# Altium PCB PCB1.PcbDoc (part 2 of 2)
Units mm, origin at the board's own origin, x right, y up, seen from the top; angles counter-clockwise.
Board outline 143 x 70 mm, 2 copper layers (Top Layer, Bottom Layer); 99 components, 75 nets, 372 pads, 741 vias.
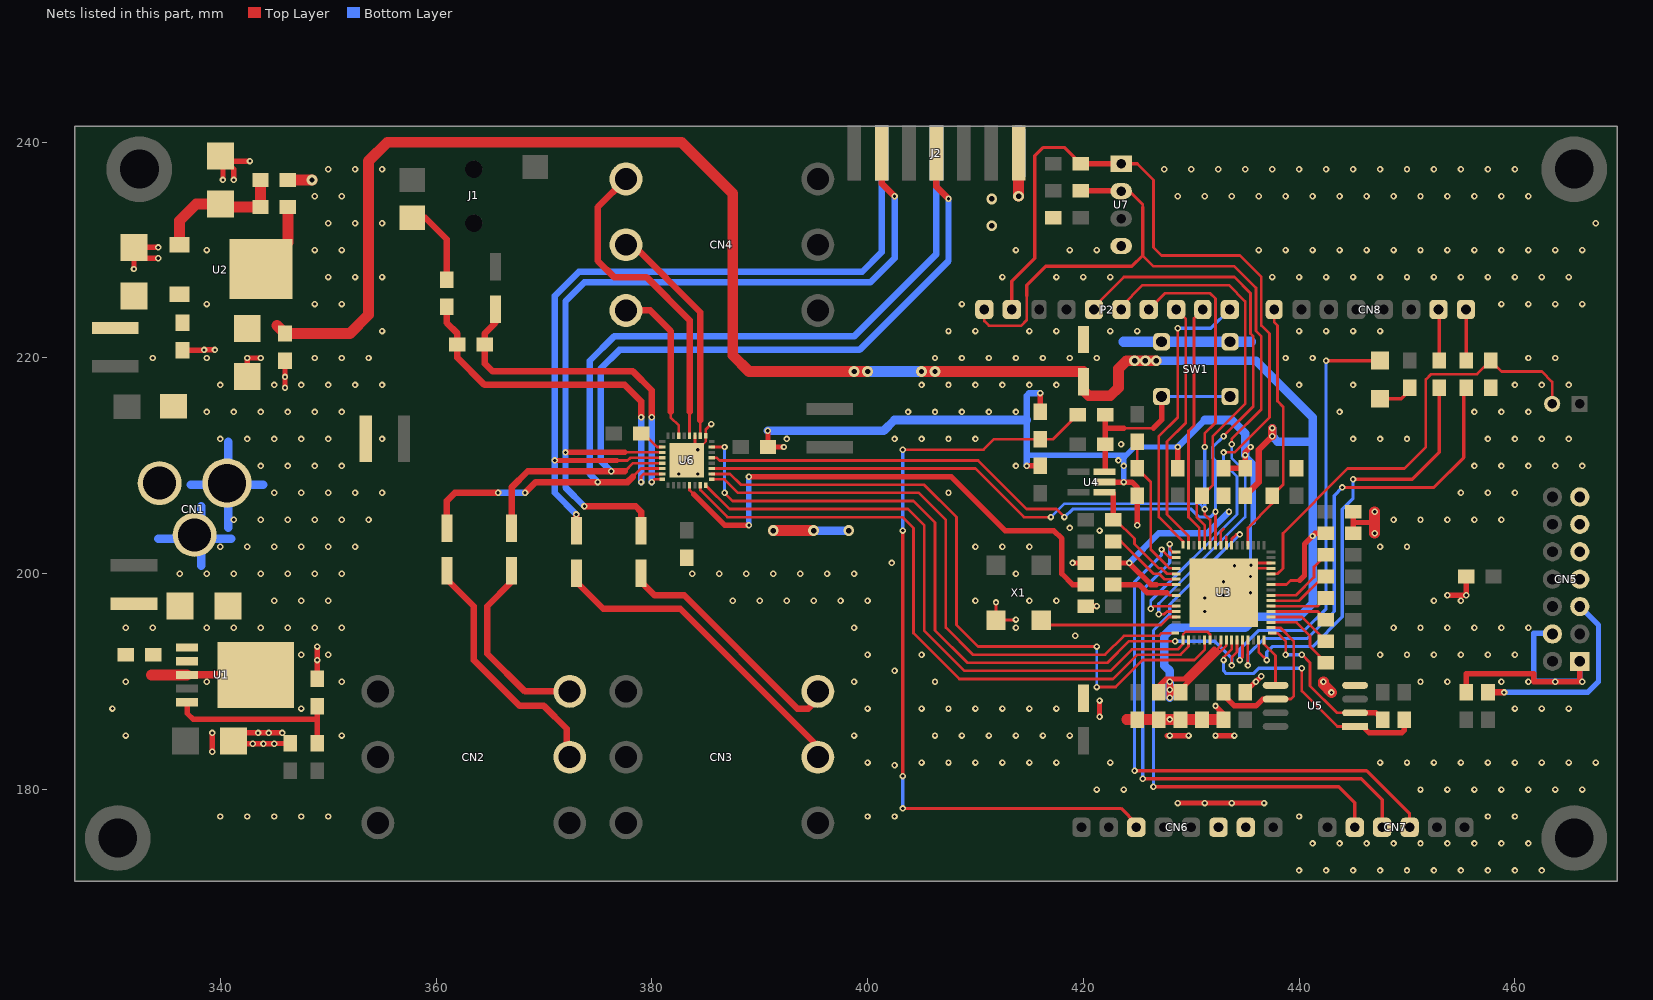
[diagram p2: the nets of this part, all layers, seen from the top]

## Via types
v1: diameter 0.6, hole 0.3, Top Layer to Bottom Layer, tented both sides, 545 vias
v2: diameter 0.6, hole 0.3, Top Layer to Bottom Layer, 165 vias
v3: diameter 1, hole 0.5, Top Layer to Bottom Layer, 31 vias

## Nets (pads, with @x,y where several pads share a name; then routed paths per layer and width w, separated by ;. In a path a pad name is that pad's centre, name@x,y a point inside that pad or via, vN(x,y) a via of type N, cw(c..) or ccw(c..) an arc to the next point about the centre after c; other vN are vias at no path point) (continued)
DGND: C1.2 C2.2 C3.2 C4.2 C5.2 C6.2 C7.2 C8.2 C9.2 C16.1 C17.1 C18.2 C19.1 C20.2 C21.2 C22.1 C23.1 C24.1 C25.2 C26.1 C27.2 C28.2 C29.1 C30.1 C31.1 C32.2 C34.2 C35.2 C36.2 CN1.1 CN1.3 CN5.1 CN5.4 CN5.7 CN5.9 CN5.11 CN5.13 CN6.6 CN6.7 J2.1 J2.2 L4.2 R3.1 R4.1 R6.1 R12.1 R23.1 R26.1 R29.2 SW1.1 SW1.2 U1.3 U1.6 U3.29 U3.30 U3.65 U4.2 U5.4 U6.1 U6.3 U6.EXP U7.4 X1.2 | length 299.7
  Top Layer w0.2: U6.EXP@384,211.25 v2(384.25,211.5) 385,212.25 U6.1@385,212.8
  Top Layer w0.25: v2(383.25,210.5) 384,211.25 U6.3@384,212.8 ; U6.1@385,212.8 385,213.377 v2(385.5,213.877) ; U3.65@435.35,200.6 435.45,200.5 U3.29@437.394,200.5 ; U3.65@435.75,201 U3.30@437.394,201
  Top Layer w0.3: v2(411.905,197.346) X1.2@411.905,195.71 413.71,195.71 v2(413.75,195.75)
  Top Layer w0.5: v2(332,228.25) 332,229.25 v2(334.25,229.25) 332.985,229.25 C3.2@332,230.235 C3.2@332,230.5 ; C3.2@332,230.75 332.5,230.25 v2(334.25,230.25) ; C2.2@336.5,220.73 338.48,220.73 v2(338.5,220.75) v2(339.5,220.75) ; v2(339.25,183.5) v2(339.25,185.25) ; v2(341.25,236.5) 341.25,237.5 C9.2@340,238.75 ; C6.2@342.5,218.265 v2(342.5,220) v2(343.75,220) ; v2(342.75,238.25) 340.5,238.25 C9.2@340,238.75 ; v2(345.75,185.25) v2(344.5,185.25) v2(343.5,185.25) 341.985,185.25 C1.2@341.235,184.5 341.485,184.25 v2(343,184.25) v2(344,184.25) v2(345,184.25) 345.02,184.27 C4.2@346.5,184.27 ; v2(346,217.25) v2(346,218.25) C5.2@346,219.73 ; R3.1@349,190.27 v2(349,192) v2(349,193.25) ; v2(382.5,209.25) 382.5,209.75 v2(383.25,210.5) 383.25,210.25 v2(384.25,209.25) ; v2(390.75,213.25) 390.77,213.23 C34.2@390.77,211.75 v2(392.25,211.75) ; v2(414.75,210) 414.77,210.02 C17.1@416,210.02 ; R29.2@416,215.02 v2(416,216.75) ; v2(419,201) C28.2@420.23,201 ; C23.1@420.23,197 v2(421.25,197) ; v2(421.5,186.75) v2(421.5,188.25) ; U4.2@421.956,208.5 v2(423.75,208.5) 424.5,208.5 425,208 ; v2(425,204.5) R12.1@425,207.23 ; v2@427.75,185 v2(428,185) v2(429.75,185) ; v2(428.75,178.75) v2(431.25,178.75) v2(433.75,178.75) v2(436.75,178.75) ; v2(428.75,211.75) 428.75,210.02 C19.1@429,209.77 ; v2(431.25,197.75) v2(431.25,196.5) U3.65@433,198.25 ; v2(432.25,185) v2(434,185) ; v2(432.25,187.75) 433,187 R26.1@433,186.48 R26.1@432.98,186.5 ; C27.2@433,209.77 C30.1@435,209.77 v2(435,211) 435,211.25 v2(435.5,211.75) ; v2(434,200.75) 433.5,200.25 U3.65@434.25,199.5 ; C32.2@435,189.02 435.98,190 v2(436,190) v2(436.5,190.5) ; U3.65@435.75,201 v2(435.55,200.8) 435.35,200.6 U3.65@434.25,199.5 ; C20.2@439.75,209.77 440,210.02 C20.2@439.75,210.27 ; C31.1@445.02,203.75 445.02,204.75 ; C22.1@445.02,205.75 445.02,204.75 ; 447,204.75 445.02,204.75 ; v2(453.75,198) v2(455.5,198) 455.48,198.02 R23.1@455.48,199.75 ; C16.1@455.5,189.02 455.5,190.75 461.75,190.75 461.75,190 466,190 466,191.86 CN5.1@466.02,191.88 ; C9.2@340,238.75 340.25,238.5 v2(340.25,236.5) 340.25,238.25 339.765,238.735 C9.2@340,238.735 C9.2@340,238.75 ; U3.65@433,198.25 v2(433,199.25) 435,199.25 v2(435.5,199.75) v2(435.5,198.25) 434.75,199 U3.65@434.25,199.5 ; U3.65@433,198.25 U3.65@434.25,199.5
  Top Layer w0.7: U1.3@336.928,190.627 U1.6@343.278,190.627
  Top Layer w1: 333.623,190.627 U1.3@336.928,190.627 ; R4.1@346.27,236.5 v3(348.5,236.5) ; v3(391.25,204) v3(395,204) ; v3(414,235) J2.2@414,239 ; 424.02,186.48 C24.1@425,186.48 C26.1@427,186.48 R26.1@433,186.48 ; v2(442.25,190) 442.25,189.75 v2(443,189) ; v2(447,203.75) 447,204.75 v2(447,205.75)
  Bottom Layer w0.3: v2(433,198) 435.5,200.5 435.5,204.5 435.75,204.75
  Bottom Layer w0.5: 414.75,211 424,211 ; v2(423.75,208.5) 423.75,210.75 424,211 ; v2(428.75,211.75) 424.75,211.75 424,211 ; v2(435,211) 435.75,210.25 435.75,204.75 ; CN5.4@463.48,194.42 463.4,194.5 461.75,194.5 461.75,190.04 461.77,190.02 466.02,190.02 CN5.1@466.02,191.88
  Bottom Layer w0.6: v2(414.75,210) 414.75,211 414.75,214.25 414.75,216.5 415,216.75 v2(416,216.75) ; v2(428.75,211.75) 431.25,214.25
  Bottom Layer w0.8: 334.25,203.25 CN1.3@338.25,203.25 ; 337.25,208.25 CN1.1@340.75,208.25 ; 338.25,200.75 CN1.3@338.25,203.25 ; 338.25,206.25 CN1.3@338.25,203.25 ; 340.75,204.25 CN1.1@340.75,208.25 ; 340.75,212.25 CN1.1@340.75,208.25 ; 341,203.25 CN1.3@338.25,203.25 ; 344,208.25 CN1.1@340.75,208.25 ; v2(390.75,213.25) 401.5,213.25 402.5,214.25 414.75,214.25 ; v3(395,204) v3(398.25,204) ; v3(414,235) J2.1@414,239 ; 431.25,214.25 433.75,214.25 435,213 v2(435,211)
  Bottom Layer w1: 423.75,221.5 SW1.1@427.25,221.5 SW1.2@433.6,221.5 435.5,221.5
  other v1: 440,172.5 442.5,172.5 445,172.5 447.5,172.5 450,172.5 452.5,172.5 455,172.5 457.5,172.5 460,172.5 462.5,172.5 441.25,175 443.75,175 446.25,175 448.75,175 451.25,175 453.75,175 456.25,175 458.75,175 461.25,175 340,177.5 342.5,177.5 345,177.5 347.5,177.5 350,177.5 400,177.5 402.5,177.5 440,177.5 457.5,177.5 460,177.5 421.25,180 423.75,180 451.25,180 453.75,180 456.25,180 458.75,180 461.25,180 463.75,180 466.25,180 400,182.5 405,182.5 407.5,182.5 410,182.5 412.5,182.5 415,182.5 417.5,182.5 422.5,182.5 447.5,182.5 450,182.5 452.5,182.5 455,182.5 457.5,182.5 460,182.5 462.5,182.5 465,182.5 467.5,182.5 331.25,185 351.25,185 398.75,185 406.25,185 408.75,185 411.25,185 413.75,185 416.25,185 418.75,185 330,187.5 347.5,187.5 400,187.5 405,187.5 407.5,187.5 410,187.5 412.5,187.5 415,187.5 417.5,187.5 460,187.5 462.5,187.5 465,187.5 331.25,190 338.75,190 351.25,190 398.75,190 406.25,190 451.25,190 453.75,190 458.75,190 461.25,190 463.75,190 466.25,190 347.5,192.5 350,192.5 400,192.5 405,192.5 447.5,192.5 450,192.5 452.5,192.5 455,192.5 457.5,192.5 460,192.5 331.25,195 333.75,195 338.75,195 341.25,195 343.75,195 346.25,195 348.75,195 351.25,195 398.75,195 413.75,195 448.75,195 451.25,195 453.75,195 456.25,195 458.75,195 461.25,195 345,197.5 347.5,197.5 350,197.5 387.5,197.5 390,197.5 392.5,197.5 395,197.5 397.5,197.5 400,197.5 410,197.5 415,197.5 417.5,197.5 452.5,197.5 455,197.5 336.25,200 338.75,200 341.25,200 343.75,200 346.25,200 348.75,200 351.25,200 383.75,200 386.25,200 388.75,200 391.25,200 393.75,200 396.25,200 398.75,200 413.75,200 340,202.5 342.5,202.5 345,202.5 347.5,202.5 350,202.5 352.5,202.5 410,202.5 412.5,202.5 415,202.5 447.5,202.5 450,202.5 341.25,205 343.75,205 346.25,205 348.75,205 351.25,205 353.75,205 448.75,205 451.25,205 453.75,205 456.25,205 458.75,205 345,207.5 347.5,207.5 350,207.5 352.5,207.5 355,207.5 407.5,207.5 455,207.5 457.5,207.5 460,207.5 343.75,210 346.25,210 348.75,210 351.25,210 413.75,210 423.75,210 456.25,210 458.75,210 461.25,210 463.75,210 466.25,210 340,212.5 342.5,212.5 345,212.5 347.5,212.5 350,212.5 355,212.5 392.5,212.5 402.5,212.5 405,212.5 407.5,212.5 410,212.5 445,212.5 447.5,212.5 450,212.5 457.5,212.5 460,212.5 462.5,212.5 465,212.5 338.75,215 341.25,215 343.75,215 346.25,215 348.75,215 351.25,215 403.75,215 406.25,215 408.75,215 411.25,215 413.75,215 443.75,215 456.25,215 458.75,215 461.25,215 340,217.5 345,217.5 347.5,217.5 350,217.5 352.5,217.5 355,217.5 405,217.5 407.5,217.5 410,217.5 412.5,217.5 415,217.5 417.5,217.5 440,217.5 445,217.5 460,217.5 462.5,217.5 465,217.5 333.75,220 338.75,220 348.75,220 351.25,220 353.75,220 406.25,220 408.75,220 411.25,220 413.75,220 416.25,220 418.75,220 421.25,220 438.75,220 441.25,220 461.25,220 463.75,220 355,222.5 407.5,222.5 410,222.5 415,222.5 417.5,222.5 422.5,222.5 425,222.5 440,222.5 442.5,222.5 445,222.5 447.5,222.5 338.75,225 348.75,225 351.25,225 408.75,225 458.75,225 461.25,225 463.75,225 466.25,225 350,227.5 352.5,227.5 355,227.5 412.5,227.5 417.5,227.5 420,227.5 422.5,227.5 437.5,227.5 440,227.5 442.5,227.5 445,227.5 447.5,227.5 450,227.5 452.5,227.5 455,227.5 457.5,227.5 460,227.5 462.5,227.5 465,227.5 338.75,230 348.75,230 351.25,230 413.75,230 418.75,230 421.25,230 436.25,230 438.75,230 441.25,230 443.75,230 446.25,230 448.75,230 451.25,230 453.75,230 456.25,230 458.75,230 461.25,230 463.75,230 466.25,230 350,232.5 352.5,232.5 355,232.5 467.5,232.5 348.75,235 351.25,235 428.75,235 431.25,235 433.75,235 436.25,235 438.75,235 441.25,235 443.75,235 446.25,235 448.75,235 451.25,235 453.75,235 456.25,235 458.75,235 461.25,235 350,237.5 352.5,237.5 355,237.5 427.5,237.5 430,237.5 432.5,237.5 435,237.5 437.5,237.5 440,237.5 442.5,237.5 445,237.5 447.5,237.5 450,237.5 452.5,237.5 455,237.5 457.5,237.5 460,237.5
  other v2: 402.5,182.25 428,186.5 402.5,191 419.25,194.25 402.25,201 421.5,204 418.75,204.25 423.25,210.5 423.5,212
  other v3: 411.5,232.25 411.5,234.75
DSP_EMU: R16.2 U3.19 | length 7.2
  Top Layer w0.25: U3.19@437.394,195.5 439.75,195.5 441,194.25 441,193.25 442.48,191.77 R16.2@442.48,191.75
DSP_TCK: R18.2 U3.24 | length 7.2
  Top Layer w0.25: U3.24@437.394,198 439.688,198 441.375,199.688 441.375,200.645 R18.2@442.48,201.75
DSP_TDI: R20.2 U3.22 | length 5.4
  Top Layer w0.25: U3.22@437.394,197 441.73,197 R20.2@442.48,197.75
DSP_TDO: R22.2 U3.23 | length 6
  Top Layer w0.25: U3.23@437.394,197.5 440,197.5 442.25,199.75 R22.2@442.48,199.75
DSP_TMS: R17.2 U3.21 | length 5.4
  Top Layer w0.25: U3.21@437.394,196.5 441.73,196.5 R17.2@442.48,195.75
DSP_TRST: R19.2 U3.20 | length 6
  Top Layer w0.25: U3.20@437.394,196 440.25,196 442.48,193.77 R19.2@442.48,193.75
LLINEIN: C10.1 J2.7 U6.14 | length 80.8
  Top Layer w0.25: C10.1@361,204.25 C10.1@361,204.969 ; 378.25,209 379,209.75 U6.14@380.95,209.75
  Top Layer w0.6: C10.1@361,204.969 361,206.75 361.75,207.5 v2(365.75,207.5) ; v2(368.25,207.5) 369.25,208.5 v2(375,208.5) 377.75,208.5 378.25,209
  Bottom Layer w0.6: v2(365.75,207.5) v2(368.25,207.5) ; v2(375,208.5) 374.25,209.25 374.25,219.75 376.5,222 398.75,222 406.38,229.63 J2.7@406.38,239
LLINEOUT: C11.2 J2.11 U6.12 | length 73.6
  Top Layer w0.25: 376.75,210.5 377.75,210.5 378,210.75 U6.12@380.95,210.75
  Top Layer w0.5: v2(371,210.5) 376.75,210.5
  Top Layer w0.6: C11.2@373,204.25 v2(373,205.5)
  Bottom Layer w0.6: v2(373,205.5) 371,207.5 v2(371,210.5) 371,225.75 373.25,228 399.5,228 401.3,229.8 J2.11@401.3,239
NetC2_1: C2.1 C3.1 L3.1 U2.1
NetC7_1: C7.1 C8.1 L2.1 U1.1 U1.2
NetC9_1: C9.1 R2.1 R4.2 U2.2 | length 13
  Top Layer w1: U2.2@336.215,230.481 336.215,232.715 337.765,234.265 C9.1@340,234.265 340.265,234 R2.1@343.73,234 R4.2@343.73,236.5
NetC10_2: C10.2 CN2.3 | length 24.1
  Top Layer w0.6: C10.2@361,201.032 361,199.5 363.5,197 363.5,192 367.75,187.75 370,187.75 372.125,185.625 372.125,183.375 372.39,183.11 CN2.3@372.39,183
NetC11_1: C11.1 CN3.3 | length 30.2
  Top Layer w0.6: C11.1@373,200.782 373,199.25 375.5,196.75 382.64,196.75 CN3.3@395.39,184
NetC12_2: C12.2 CN2.5 | length 18.5
  Top Layer w0.6: C12.2@367,201.032 367,199.25 364.75,197 364.75,192.596 368.25,189.096 CN2.5@372.39,189.096
NetC13_1: C13.1 CN3.5 | length 24.9
  Top Layer w0.6: C13.1@379,200.782 379,199.25 380.25,198 383,198 393.5,187.5 394.5,187.5 395.39,188.39 CN3.5@395.39,190.096
NetC14_1: C14.1 J1.2 | length 7.8
  Top Layer w0.6: J1.2@357.8,233 359,233 361,231 C14.1@361,227.27
NetC14_2: C14.2 R5.1 U6.15 | length 33.9
  Top Layer w0.25: v2(379,208.5) 379,209 379.25,209.25 380.25,209.25 U6.15@380.95,209.25
  Top Layer w0.6: C14.2@361,224.73 361,223.25 361.98,222.27 R5.1@361.98,221.25 361.98,220.02 364.5,217.5 377.5,217.5 379,216 v2(379,214.5)
  Bottom Layer w0.6: v2(379,208.5) v2(379,214.5)
NetC15_2: C15.2 R5.2 U6.16 | length 31.5
  Top Layer w0.25: v2(379.988,208.5) 380.237,208.75 380.525,208.75 U6.16@380.95,208.75
  Top Layer w0.6: C15.2@365.5,224.531 365.5,223.25 364.52,222.27 R5.2@364.52,221.25 364.52,219.48 365.25,218.75 378.25,218.75 380,217 v2(380,214.5)
  Bottom Layer w0.6: v2(379.988,208.5) 379.988,214.488 v2(380,214.5)
NetC33_2: C33.2 U6.10 | length 2.2
  Top Layer w0.25: C33.2@379.25,212.98 380.48,211.75 U6.10@380.95,211.75
NetCN1_2: CN1.2 D1.1
NetCN4_1: CN4.1 U6.4 | length 30.2
  Top Layer w0.25: U6.4@383.5,212.8 383.5,215
  Top Layer w0.6: CN4.1@377.61,236.596 375,233.986 375,229 376.5,227.5 379.5,227.5 383.5,223.5 383.5,216 383.5,215
NetCN4_3: CN4.3 U6.2 | length 20.9
  Top Layer w0.25: U6.2@384.5,212.8 384.5,214.25
  Top Layer w0.6: CN4.3@377.61,230.5 378.25,230.5 384.5,224.25 384.5,214.25
NetCN4_5: CN4.5 U6.6 | length 14.9
  Top Layer w0.25: 381.75,215 381.75,214.5 382.5,213.75 U6.6@382.5,212.8
  Top Layer w0.6: CN4.5@377.61,224.404 379.846,224.404 381.75,222.5 381.75,215
NetCN5_5: CN5.5 R15.1 | length 18.3
  Top Layer w0.6: R15.1@457.5,189.02 v2@459,189.02
  Bottom Layer w0.5: v2(459,189) 466.75,189 467.75,190 467.75,195.23 CN5.5@466.02,196.96
NetCN6_3: CN6.3 R29.1 R30.2 | length 73.4
  Top Layer w0.25: v2(403.25,211.5) 410.75,211.5 411.73,212.48 R29.1@416,212.48 417.21,212.48 R30.2@419.48,214.75
  Top Layer w0.3: v2(403.25,178.25) 423.5,178.25 424.902,176.848 CN6.3@424.902,176.495 ; v2(403.25,181.25) v2(403.25,204)
  Bottom Layer w0.3: v2(403.25,178.25) v2(403.25,181.25) ; v2(403.25,204) v2(403.25,211.5)
NetCN7_3: CN7.3 U3.50 | length 51.6
  Top Layer w0.25: v2(427.25,202.25) 428,201.5 U3.50@428.606,201.5
  Top Layer w0.3: v2(424.75,181.75) 446.25,181.75 450.242,177.758 CN7.3@450.242,176.495
  Bottom Layer w0.3: v2(424.75,181.75) 424.75,199.25 427.25,201.75 v2(427.25,202.25)
NetCN7_4: CN7.4 U3.49 | length 49.6
  Top Layer w0.25: v2(428,202.75) 428,202.25 428.25,202 U3.49@428.606,202 ; CN7.4@447.702,176.495 CN7.4@447.702,177
  Top Layer w0.3: v2(425.5,181) 445.75,181 447.702,179.048 CN7.4@447.702,177
  Bottom Layer w0.3: v2(425.5,181) 425.5,198.5 428,201 v2(428,202.75)
NetCN7_5: CN7.5 U3.39 | length 49.8
  Top Layer w0.25: U3.39@433.75,202.644 433.75,203.2 434.2,203.65 v2(434.5,203.65)
  Top Layer w0.3: v2(426.5,180.25) 443.682,180.25 445.162,178.77 CN7.5@445.162,176.495
  Bottom Layer w0.3: v2(426.5,180.25) 426.5,194.75 428,196.25 428,197.15 v2(434.5,203.65)
NetCN8_1: CN8.1 R11.1 U3.36 | length 23.6
  Top Layer w0.25: U3.36@435.25,202.644 435.25,204.25 437.5,206.5 R11.1@437.5,207.23 438.52,208.25 438.52,215.48 438,216 438,223 437.682,223.318 CN8.1@437.682,224.495
NetCN8_7: CN8.7 R31.1 | length 4.8
  Top Layer w0.3: CN8.7@452.922,224.495 453,224.417 R31.1@453,219.77
NetCN8_8: CN8.8 R32.1 | length 4.7
  Top Layer w0.3: CN8.8@455.462,224.495 455.5,224.457 R32.1@455.5,219.77
NetD2_1: D2.1 R7.1 | length 3.3
  Top Layer w0.3: D2.1@447.5,216.222 449.472,216.222 450.25,217 R7.1@450.25,217.23
NetD2_2: D2.2 U3.12 | length 40.5
  Top Layer w0.25: v2(434.5,192) 434.75,192.25 U3.12@434.75,193.856
  Top Layer w0.3: v2(442.5,219.75) 447.472,219.75 D2.2@447.5,219.778
  Bottom Layer w0.3: v2(434.5,192) 434.5,193 436.25,194.75 440.5,194.75 442.5,196.75 v2(442.5,219.75)
NetP1_2: P1.2 R6.2 U3.28 | length 42.7
  Top Layer w0.25: U3.28@437.394,200 438,200 438.5,200.5 438.5,203.75 444.5,209.75 449.75,209.75 451.75,211.75 451.75,218 452.25,218.5 456.48,218.5 R6.2@457.75,219.77 458.77,218.75 462.5,218.75 463.46,217.79 P1.2@463.46,215.75
NetP2_1: P2.1 R27.1 U3.60 U7.2 | length 80.4
  Top Layer w0.25: P2.1@410.822,224.495 410.822,223.428 411.25,223 414.25,223 414.75,223.5 414.75,225.75 ; U7.2@424.25,235.5 425.5,234.25 425.5,234 ; 425.5,229.5 426.5,228.5 434,228.5 436,226.5 436,222.5 436.5,222 436.5,215.25 433.75,212.5 v2(433.75,212) ; v2(427,196.25) 427.5,196.25 427.75,196.5 U3.60@428.606,196.5
  Top Layer w0.3: 414.75,225.75 414.75,226.75 416.5,228.5 424.5,228.5 425.5,229.5 425.5,234 ; U7.2@423.46,235.5 U7.2@424.25,235.5
  Top Layer w0.5: R27.1@419.77,235.5 U7.2@423.46,235.5
  Bottom Layer w0.25: 427,197.25 435,205.25 435,209.5 433.75,210.75 v2(433.75,212)
  Bottom Layer w0.3: v2(427,196.25) 427,197.25
NetP2_2: P2.2 R28.1 U3.59 U7.1 | length 85.5
  Top Layer w0.25: 425,238 426.5,236.5 426.5,230.25 427.25,229.5 434.5,229.5 436.5,227.5 436.5,223 437.25,222.25 437.25,214.5 434,211.25 v2(433,211.25) ; v2(426.25,196.75) 426.5,197 U3.59@428.606,197
  Top Layer w0.3: P2.2@413.362,224.495 413.362,227.112 415.5,229.25 415.5,238.75 416.25,239.5 418.27,239.5 R28.1@419.77,238 ; U7.1@423.5,238 425,238
  Top Layer w0.5: R28.1@419.77,238 U7.1@423.5,238
  Bottom Layer w0.25: U7.1@422.75,238 U7.1@423.5,238 ; v2(426.25,196.75) 426.25,197.5 434.25,205.5 434.25,209 433,210.25 v2(433,211.25)
NetP2_5: P2.5 U3.42 U6.29 | length 91.4
  Top Layer w0.25: U6.29@385.55,210.75 386.025,210.75 386.275,210.5 410.25,210.5 414.75,206 417.5,206 v2(418.25,205.25) ; P2.5@420.982,224.495 420.982,224.732 423.75,227.5 434,227.5 435.5,226 435.5,222.25 435.75,222 435.75,215.5 v2(433,212.75) ; U3.42@432.25,202.644 v2(432.25,205.75)
  Bottom Layer w0.3: v2(418.25,205.25) 419,206 430,206 430.75,205.25 431.75,205.25 v2(432.25,205.75) 432.25,210.5 432,210.75 432,211.75 v2(433,212.75)
NetP2_6: P2.6 R14.1 U3.44 | length 38
  Top Layer w0.25: P2.6@423.522,224.495 423.522,224.772 425.5,226.75 433.5,226.75 435,225.25 435,215.75 432,212.75 432,208.23 R14.1@431,207.23 430.5,206.73 430.5,205.25 431.25,204.5 U3.44@431.25,202.644
NetP2_7: P2.7 U3.43 U6.27 | length 78.8
  Top Layer w0.25: U6.27@385.55,209.75 410,209.75 414.5,205.25 v2(417,205.25) ; P2.7@426.062,224.495 427.567,226 431.75,226 432.25,225.5 432.25,214 431.25,213 v2(431.25,211.75) ; v2(431.25,206) 431.25,205.5 431.75,205 U3.43@431.75,202.644
  Bottom Layer w0.25: v2(417,205.25) 418.25,206.5 430.75,206.5 v2(431.25,206)
  Bottom Layer w0.3: v2(431.25,206) v2(431.25,211.75)
NetP2_8: P2.8 U3.47 | length 23.5
  Top Layer w0.25: P2.8@428.602,224.495 429.5,223.597 429.5,214 427.75,212.25 427.75,205.5 429.75,203.5 U3.47@429.75,202.894
NetP2_9: P2.9 U3.45 | length 22.8
  Top Layer w0.25: U3.45@430.75,202.644 430.75,204.25 429.75,205.25 429.75,213.25 430.25,213.75 430.25,223.673 P2.9@431.072,224.495
NetP2_10: P2.10 U3.48 | length 27
  Top Layer w0.25: v2(428.75,222.75) 428.75,214.5 427,212.75 427,205.25 429.25,203 U3.48@429.25,202.95
  Bottom Layer w0.3: v2(428.75,222.75) 431.827,222.75 P2.10@433.572,224.495
NetR1_1: R1.1 R3.2 U1.5 | length 16.8
  Top Layer w0.5: U1.5@336.928,188.087 336.928,187.072 337.5,186.5 349,186.5 ; R1.1@349,184.27 R3.2@349,187.73
NetR8_1: R8.1 U3.57 | length 6.3
  Top Layer w0.25: 427.75,198.25 428,198 U3.57@428.606,198
  Top Layer w0.5: R8.1@422.77,199 425.15,199 425.9,198.25 427.75,198.25
NetR8_2: R8.2 U6.21 | length 49.1
  Top Layer w0.25: U6.21@383.5,208.2 383.5,207.75 383.875,207.375
  Top Layer w0.5: 383.875,207.375 386.75,204.5 v2(389,204.5) ; v2(389,209) 407.75,209 412.75,204 417.25,204 418,203.25 418,200 419,199 R8.2@420.23,199
  Bottom Layer w0.5: v2(389,204.5) v2(389,209)
NetR9_1: R9.1 R12.2 U3.52 | length 13.6
  Top Layer w0.25: R9.1@425,212.23 R12.2@425,209.77 426.25,208.52 426.25,202.25 427.5,201
  Top Layer w0.254: 427.5,201 428,200.5 U3.52@428.606,200.5
NetR10_1: R10.1 U3.53 U4.1 | length 11.5
  Top Layer w0.25: R10.1@422.77,205 423,205 424.75,203.25 424.75,202.75 427,200.5 427.25,200.5
  Top Layer w0.254: 427.25,200.5 427.75,200 U3.53@428.606,200
  Top Layer w0.5: U4.1@421.956,207.55 422.7,207.55 422.77,207.48 R10.1@422.77,205
NetR13_1: R13.1 U3.54 | length 7.3
  Top Layer w0.25: R13.1@422.77,203 423.5,203 426.5,200 427,200
  Top Layer w0.254: 427,200 427.5,199.5 U3.54@428.606,199.5
NetR21_1: R21.1 R30.1 SW1.3 SW1.4 U4.3 | length 19.4
  Top Layer w0.25: 423.75,213.5 426.5,213.5
  Top Layer w0.5: U4.3@421.956,209.45 422.02,209.513 R21.1@422.02,212 422.02,213.5 ; R30.1@422.02,214.75 422.02,213.5 ; 423.75,213.5 422.02,213.5 ; 426.5,213.5 427.25,214.25 SW1.3@427.25,216.42
  Bottom Layer w0.3: SW1.3@427.5,216.42 SW1.4@433.6,216.42 SW1.4@433.85,216.42
NetR24_1: R24.1 U3.17 U5.2 | length 15.7
  Top Layer w0.25: U3.17@437.394,194.5 438,194.5 438.75,193.75 v2(438.75,192.5) ; v2(440.25,192.5) 441,191.75 441,189.615 443.5,187.115 U5.2@445.183,187.115
  Top Layer w0.5: U5.2@445.183,187.115 447.115,187.115 R24.1@447.75,186.48
  Bottom Layer w0.3: v2(438.75,192.5) v2(440.25,192.5)
NetR25_1: R25.1 U3.10 U5.1 | length 25
  Top Layer w0.25: v2(433,192) 433,192.25 433.75,193 U3.10@433.75,193.856 ; v2(440.25,191.25) 440.25,189.139 443.544,185.845 U5.1@445.183,185.845
  Top Layer w0.5: U5.1@445.183,185.845 445.905,185.845 446.5,185.25 449.5,185.25 449.75,185.5 R25.1@449.75,186.48
  Bottom Layer w0.3: v2(433,192) 433,191 433.25,190.75 435.75,190.75 436.25,191.25 v2(440.25,191.25)
NetR26_2: R26.2 U3.18 U5.6 | length 15.3
  Top Layer w0.25: R26.2@433,188.75 R26.2@433,189.02 ; U3.18@437.394,195 438.25,195 439.5,193.75 439.5,188.635 439.25,188.385 U5.6@437.817,188.385
  Top Layer w0.5: R26.2@433,188.75 434,187.75 436,187.75 436.635,188.385 U5.6@437.817,188.385
NetR31_2: R31.2 U3.15 | length 39.4
  Top Layer w0.25: U3.15@436.25,193.856 436.25,192.75 v2(437,192)
  Top Layer w0.3: v2(445,208.75) 450.5,208.75 453,211.25 R31.2@453,217.23
  Bottom Layer w0.3: v2(437,192) 437,192.75 437.5,193.25 441.25,193.25 444,196 444,206 445,207 v2(445,208.75)
NetR32_2: R32.2 U3.13 | length 43.8
  Top Layer w0.25: v2(435.25,191.5) U3.13@435.25,193.856
  Top Layer w0.3: v2(444,208) 452.5,208 455.27,210.77 455.27,217 R32.2@455.5,217.23
  Bottom Layer w0.3: v2(435.25,191.5) 435.25,192.5 436.75,194 440.75,194 443.25,196.5 443.25,207.25 v2(444,208)
NetU3_1: U3.1 U3.6 U6.24 | length 62.2
  Top Layer w0.2: U3.1@429.25,193.856 429.25,194.4 429.475,194.625 429.875,194.625
  Top Layer w0.25: U6.24@385,208.2 387.2,206 403.75,206 405.25,204.5 405.25,194.75 409,191 422.5,191 424.5,193 428.75,193 429.25,193.5 U3.1@429.25,193.856 ; 429.875,194.625 431.5,194.625 431.75,194.375 U3.6@431.75,193.856
NetU3_2: U3.2 U6.23 | length 60.5
  Top Layer w0.25: U6.23@384.5,208.2 384.5,207.75 387,205.25 403.25,205.25 404.25,204.25 404.25,194.5 408.5,190.25 422.75,190.25 425,192.5 429,192.5 429.75,193.25 U3.2@429.75,193.856
NetU3_5: U3.5 U6.26 | length 64.3
  Top Layer w0.25: U6.26@385.55,209.25 387.25,209.25 388.25,208.25 405.25,208.25 408.25,205.25 408.25,195.25 410.25,193.25 v2(421.25,193.25) ; v2(421.25,189.5) 423,189.5 425.5,192 430.3,192 431.25,192.95 U3.5@431.25,193.856
  Bottom Layer w0.25: v2(421.25,189.5) v2(421.25,193.25)
NetU3_11: U3.11 U6.31 | length 69.5
  Top Layer w0.25: U6.31@385.55,211.75 v2(386.75,211.75) ; v2(386.75,207.5) 387.5,206.75 404.25,206.75 406.25,204.75 406.25,194.75 409.25,191.75 422.25,191.75 424.25,193.75 v2(428.5,193.75) ; v2(433.75,191.5) 433.75,192.25 434.25,192.75 U3.11@434.25,193.856
  Bottom Layer w0.3: v2(386.75,207.5) v2(386.75,211.75) ; v2(428.5,193.75) 432.169,193.75 433.75,192.169 v2(433.75,191.5)
NetU3_16: U3.16 U5.5 | length 4.6
  Top Layer w0.25: U3.16@436.75,193.856 436.75,193.5 437.817,192.433 U5.5@437.817,189.655
NetU3_61: U3.61 X1.3 | length 12.3
  Top Layer w0.25: X1.3@416.636,195.25 427.2,195.25 427.95,196 U3.61@428.606,196
NetU3_64: U3.64 U6.25 | length 56.2
  Top Layer w0.25: U6.25@385.55,208.75 386.75,208.75 388,207.5 404.75,207.5 407.25,205 407.25,195 409.75,192.5 422,192.5 423.75,194.25 427,194.25 427.25,194.5 U3.64@428.3,194.5
RLINEIN: C12.1 J2.8 U6.13 | length 74.7
  Top Layer w0.25: 377.5,209.5 378.25,210.25 U6.13@380.95,210.25
  Top Layer w0.6: C12.1@367,204.969 367,208 368.5,209.5 v2(376.25,209.5) 377.5,209.5 ; J2.8@406.38,239 406.38,235.87 v2(407.5,234.75)
  Bottom Layer w0.6: v2(376.25,209.5) 375.25,210.5 375.25,219 377,220.75 399.25,220.75 407.5,229 v2(407.5,234.75)
RLINEOUT: C13.2 J2.12 U6.11 | length 77.6
  Top Layer w0.25: 377.5,211.25 U6.11@380.95,211.25
  Top Layer w0.5: v2(372,211.25) 377.5,211.25
  Top Layer w0.6: v2(373.75,206.25) 378.5,206.25 379,205.75 C13.2@379,204.719 ; J2.12@401.3,239 401.3,236.2 v2(402.5,235)
  Bottom Layer w0.6: v2(373.75,206.25) 372,208 v2(372,211.25) 372,225.25 373.75,227 400.25,227 402.5,229.25 v2(402.5,235)
VDD_INT: C5.1 C6.1 C25.1 C26.2 C27.1 C28.1 C29.2 C30.2 C31.2 R2.2 U2.3 U3.8 U3.9 U3.26 U3.40 U3.41 U3.55 | length 244.3
  Top Layer w0.25: 432.35,192.95 432.75,193.35 U3.8@432.75,193.856 ; 432.7,192.8 433.25,193.35 U3.9@433.25,193.856 ; U3.41@432.75,202.644 432.75,203.9 433,204.15 ; U3.40@433.25,202.644 433.25,203.4 ; U3.26@437.394,199 438.825,199 439.2,199.375 440.05,199.375
  Top Layer w0.254: 426.75,199 U3.55@428.606,199
  Top Layer w0.5: C28.1@422.77,201 v2(424.25,201) 426.25,199 426.75,199 ; C26.2@427,189.02 427,189.6 427.65,190.25 429.375,190.25 432.125,193 ; C29.2@429,189.02 429,189.25 432.475,192.725 ; 440.05,199.375 440.5,199.825 440.5,202.75 v2(441.25,203.5) 441.5,203.75 C31.2@442.48,203.75
  Top Layer w0.6: v2(428,188.5) v2(428,189.25) v2@428,189.5 ; v2(428,190) v2@428,189.5 ; C29.2@429,189.02 428.48,189.02 v2@428,189.5 ; C27.1@433,207.23 C27.1@433.3,206.93 ; C30.2@435,207.23 436.25,208.48 436.25,211.5 v2(437.5,212.75)
  Top Layer w0.8: v2(437.5,212.75) v2(437.5,213.5)
  Top Layer w1: U2.3@343.785,228.246 346.27,230.731 R2.2@346.27,234 ; 345.25,223 345.27,223 C5.1@346,222.27 352.02,222.27 353.75,224 353.75,238.25 355.5,240 382.75,240 387.5,235.25 387.5,220.25 389,218.75 v3(398.75,218.75) v3(400,218.75) ; v3(405,218.75) v3(406.25,218.75) 420,218.75 C25.1@420,217.781 420,217 420.5,216.5 422.5,216.5 423.25,217.25 423.25,219 424,219.75 v3(424.75,219.75) v3(425.75,219.75) v3(426.75,219.75)
  Bottom Layer w0.6: v2(424.25,201) 427,203.75 431.5,203.75 v2(433.5,205.75)
  Bottom Layer w0.8: v3(424.75,219.75) v3(425.75,219.75) v3(426.75,219.75) 436,219.75 441.25,214.5 441.25,212.25 ; v2(428,188.5) v2(428,189.25) v2(428,190) 428,191 427.5,191.5 427.5,194.25 428.25,195 435,195 436,196 440,196 441.25,197.25 v2(441.25,203.5) 441.25,212.25 ; v2(437.5,213.5) v2(437.5,212.75) 438,212.25 441.25,212.25
  Bottom Layer w1: v3(398.75,218.75) v3(400,218.75) v3(405,218.75) v3(406.25,218.75)
pads on no net: CN2.2 CN2.4 CN2.6 CN3.2 CN3.4 CN3.6 CN4.2 CN4.4 CN4.6 CN5.3 CN6.1 CN6.2 CN6.4 CN6.5 CN7.1 CN7.2 CN7.6 CN8.2 CN8.3 CN8.4 CN8.5 CN8.6 J1.3 J1.None J2.3 J2.4 P2.3 P2.4 PAR1.1 PAR2.1 PAR3.1 PAR4.1 U3.4 U3.7 U3.31 U3.32 U3.33 U3.34 U3.37 U3.38 U3.51 U3.56 U3.62 U3.63 U4.4 U5.3 U6.8 U6.9 U6.17 U6.18 U6.19 U6.22 U6.28 X1.1

## Polygon pours and split planes (outlines as drawn)
DGND on Bottom Layer "DGND_L02_P002" (solid, remove dead copper, pour order 2): 327,241 327,172 469,172 469,241
AGND on Bottom Layer "AGND_L02_P000" (solid, remove dead copper, pour order 0): 397.5,176.25 352.5,176.25 352.5,199 352.5,200 356.25,203.75 356.25,238.75 356.25,241 410.25,241 410.25,228.5 403.75,222 403.75,216.75 401.5,214.5 398.75,214.5 385.5,214.5 384.75,213.75 384.5,213.5 383,213.5 382.75,213.5 382.25,213 382,212.75 382,208.75 382,200.5 382.5,200 387.5,195 397,195 397.5,195
DGND on Top Layer "DGND_L01_P006" (solid, remove dead copper, pour order 6): 327,241 327,172 469,172 469,241
AGND on Top Layer "AGND_L01_P004" (solid, remove dead copper, pour order 4): 397.5,176.25 352.5,176.25 352.5,199 352.5,200 356.25,203.75 356.25,238.75 356.25,241 415,241 415,233.25 414.25,232.5 403.75,222 403.75,216.75 401.5,214.5 398.75,214.5 385.5,214.5 384.75,213.75 384.5,213.5 383,213.5 382.75,213.5 382.25,213 382,212.75 382,208.75 382,200.5 382.5,200 387.5,195 397,195 397.5,195

## Other copper
Top Layer:
  region net +VIN: 397.25,241.25 398.5,241.25 398.5,236.75 397.25,236.75
  region net AGND: 356.25,215.25 356.25,209.75 358.25,209.75 358.25,215.25
  pour cut-out: 436.75,194.5 429,194.5 429,202.25 436.75,202.25
  region net VDD_INT: 433.4,203.45 432.6,203.45 432.6,204.15 433.1,204.65 433.1,207.85 435.6,207.85 435.6,205.65
  region net NetCN1_2: 337.5,217 337.5,207.5 336.5,206.5 333.5,206.5 333,207 333,211 334,212 334,217
  region net +VIN: 333,220 333,212.5 331.25,210.75 331.25,207.25 334.5,204 334.5,200 327.25,200 327.25,220
  region net NetC7_1: 338,198.5 338,191.5 333,191.5 333,193.5 335,193.5 335,196 329.5,196 329.5,198.5
  region net NetC2_1: 337.5,227.5 337.5,222.5 335.5,222.5 335.5,224.5 333,224.5 333,223.5 333,222 327.5,222 327.5,227.5
  region net VDD_INT: 340.5,232 340.5,221.5 347.5,221.5 347.5,232
  region net D3V3: 338.5,186 338.5,182.5 333,182.5 333,189.75 335.5,189.75 335.5,186
  region net D3V3: 350,182.5 350,180.5 335,180.5 333,182.5
  region net VDD_INT: 430,188 426.25,188 426.25,189.75 427,190.5 430,190.5
  region net DGND: 352.5,215.25 352.5,209.75 354.5,209.75 354.5,215.25
  pour cut-out: 329,200 334.806,200 334.806,198.556 334.75,198.5 329,198.5
  region net DGND: 345,194.25 345,187.25 347.25,187.25 347.25,194.25
  pour cut-out: 361.5,223.75 365,223.75 365,222 361.5,222
  pour cut-out: 336.75,206.5 336.75,204.25 334.25,204.25 334,204 333.25,204.75 333.25,206.084 333.383,206.217
  pour cut-out: 332.75,217.25 334.5,217.25 334.5,215.75 334.25,216 332.75,216
  region net DGND: 338.25,211.5 338.25,201 340,201 340,211.5
Bottom Layer:
  region net +VIN: 398.75,236.75 397.25,236.75 397.25,241.25 398.75,241.25
  pour cut-out: 439.5,198.25 440.75,198.25 440.75,198.286 440.536,198.5 439.5,198.5
  region net DGND: 337.25,212.25 337.25,199.75 341.75,199.75 341.75,212 341.5,212.25

## Silkscreen, mask and mechanical layers (free items; w line width, h text height)
Top Overlay:
  region: 427.8,193.8 428.425,193.175 427.8,193.175
Bottom Overlay:
  drawing of 78 lines, arcs and shapes, not listed
Borda:
  the board outline again, w0.2

## Text inside footprints (layer, text, board x,y; h text height)
CN5: Top Overlay "13" at 466.798,213.082 h1.2 r90; Top Overlay "2" at 464.258,185.177 h1.2 r90; Top Overlay "1" at 466.798,185.304 h1.2 r90; Top Overlay "14" at 464.258,213.082 h1.2 r90; Mechanical 1 "14" at 464.258,213.082 h0.95 r90; Mechanical 1 "13" at 466.798,213.082 h0.95 r90; Mechanical 1 "2" at 464.258,185.177 h0.95 r90; Mechanical 1 "1" at 466.798,185.304 h0.95 r90
CN6: Top Overlay "1" at 419.35,174.025 h1.2
CN7: Top Overlay "1" at 455.2,174.05 h1.2
CN8: Top Overlay "1" at 437.5,221.75 h1.2
P2: Top Overlay "1" at 410.522,221.795 h1.2
U3: Mechanical 13 "*" at 428.619,192.814 h1.27 r90